# EAGLE board assig1b (EAGLE 9.7.0)

Size 94.5 x 86.62 mm. Coordinates in mm from the lower left corner, seen from the top.
Outline: 0,0 94.5,0 94.5,86.62 0,86.62 0,0
Copper layers (1*16): Top 0.035mm / dielectric 1.5mm / Bottom 0.035mm
Design rules "default": minimum track width 6mil, minimum drill 0.35mm, track to track 6mil, track to pad 6mil, pad to pad 6mil, via to via 6mil, smd to smd 6mil, copper to edge 40mil, drill to drill 6mil, minimum pad ring 10mil, minimum via ring 8mil, stop-mask expansion 4mil, vias tented up to drill 0mil, thermal gap 10mil

## Footprints (pad centres in the part's own frame; a part is rotated, then mirrored left to right if it is on the bottom)
LEDRD254W60D565H860B = drill 0.981 pad 1.581: 1 -1.27,0; 2 1.27,0
RESAD1016W63L850D250B = drill 0.83 pad 1.43: 1 -5.08,0; 2 5.08,0
ARDUINO-UNO-R3-SHIELD = drill 1.016 pad 1.88: 3.3V 24.13,-2.54; 5V 24.13,0; A0 24.13,12.7; A1 24.13,15.24; A2 24.13,17.78; A3 24.13,20.32; A4 24.13,22.86; A5 24.13,25.4; AREF -24.13,-13.97; D2 -24.13,20.32; D3 -24.13,17.78; D4 -24.13,15.24; D5 -24.13,12.7; D6 -24.13,10.16; D7 -24.13,7.62; D8 -24.13,3.81; D9 -24.13,1.27; D10 -24.13,-1.27; D11 -24.13,-3.81; D12 -24.13,-6.35; D13 -24.13,-8.89; GND@0 24.13,2.54; GND@1 24.13,5.08; GND@2 -24.13,-11.43; IOREF 24.13,-7.62; NC 24.13,-10.16; RES 24.13,-5.08; RX -24.13,25.4; SCL -24.13,-19.05; SDA -24.13,-16.51; TX -24.13,22.86; VIN 24.13,7.62
TO92 = drill 0.813 octagon: 1 -1.27,0; 2 0,1.905; 3 1.27,0

## Placement (x,y rotation side)
D1  RED  [LEDRD254W60D565H860B]  38.88,78.71 180 top
D2  RED  [LEDRD254W60D565H860B]  54.12,78.71 180 top
D3  RED  [LEDRD254W60D565H860B]  76.98,78.71 180 top
D4  RED  [LEDRD254W60D565H860B]  61.74,78.71 180 top
D5  RED  [LEDRD254W60D565H860B]  46.5,78.71 180 top
D6  RED  [LEDRD254W60D565H860B]  69.36,78.71 180 top
R1  220  [RESAD1016W63L850D250B]  75.71,71.09 90 top
R2  220  [RESAD1016W63L850D250B]  52.85,71.09 90 top
R3  220  [RESAD1016W63L850D250B]  60.47,71.09 90 top
R4  220  [RESAD1016W63L850D250B]  45.23,71.09 90 top
R5  220  [RESAD1016W63L850D250B]  68.09,71.09 90 top
R6  220  [RESAD1016W63L850D250B]  37.61,71.09 90 top
U1  ARDUINO-UNO-R3-SHIELD  [ARDUINO-UNO-R3-SHIELD]  47.88,29.84 270 top
U2  TMP36GT9Z_TO92  [TO92]  88.41,78.71 0 top

## Library data of the parts
D1-D6 = Tinkercad; CATEGORY: Opto-Electronic; SUB-CATEGORY: LED; VALUE: LED_RED
R1-R6 U1 U2 = Tinkercad

## Nets
D1_C: D1.2 R6.2
D2_C: D2.2 R2.2
D3_C: D3.2 R1.2
D4_C: D4.2 R3.2
D5_C: D5.2 R4.2
D6_C: D6.2 R5.2
U1_5V: U1.5V U2.3
U1_A0: U1.A0 U2.2
U1_D3: D3.1 U1.D3
U1_D4: D6.1 U1.D4
U1_D5: D4.1 U1.D5
U1_D6: D2.1 U1.D6
U1_D7: D5.1 U1.D7
U1_D8: D1.1 U1.D8
U1_GND: R1.1 R2.1 R3.1 R4.1 R5.1 R6.1 U1.GND@0 U1.GND@1 U1.GND@2 U2.1

## Tracks (layer width: path | path; a pad name or v marks a point on that pad's centre or on a via)
D1_C  (1 unrouted)
D2_C  (1 unrouted)
D3_C  (1 unrouted)
D4_C  (1 unrouted)
D5_C  (1 unrouted)
D6_C  (1 unrouted)
U1_5V  (1 unrouted)
U1_A0  (1 unrouted)
U1_D3  (1 unrouted)
U1_D4  (1 unrouted)
U1_D5  (1 unrouted)
U1_D6  (1 unrouted)
U1_D7  (1 unrouted)
U1_D8  (1 unrouted)
U1_GND  (9 unrouted)